# Altium PCB switch-SS12D11-G5_2024-05-03.pcbdoc
Units mm, origin at the board's own origin, x right, y up, seen from the top; angles counter-clockwise.
Board outline 42.21 x 43.19 mm, 2 copper layers (Top Layer, Bottom Layer); 1 components, 0 nets, 5 pads, 0 vias.
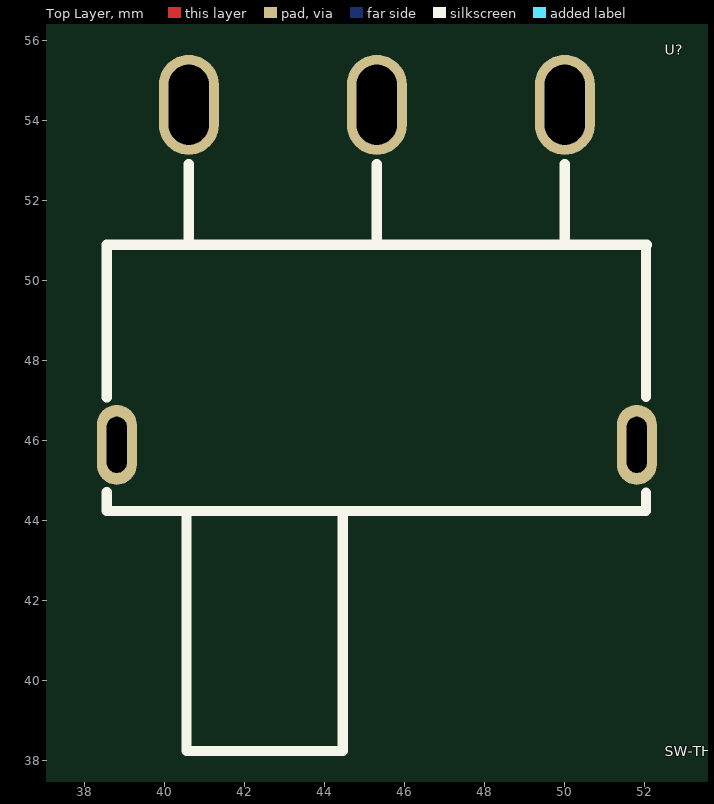
[diagram p0: Top Layer view]
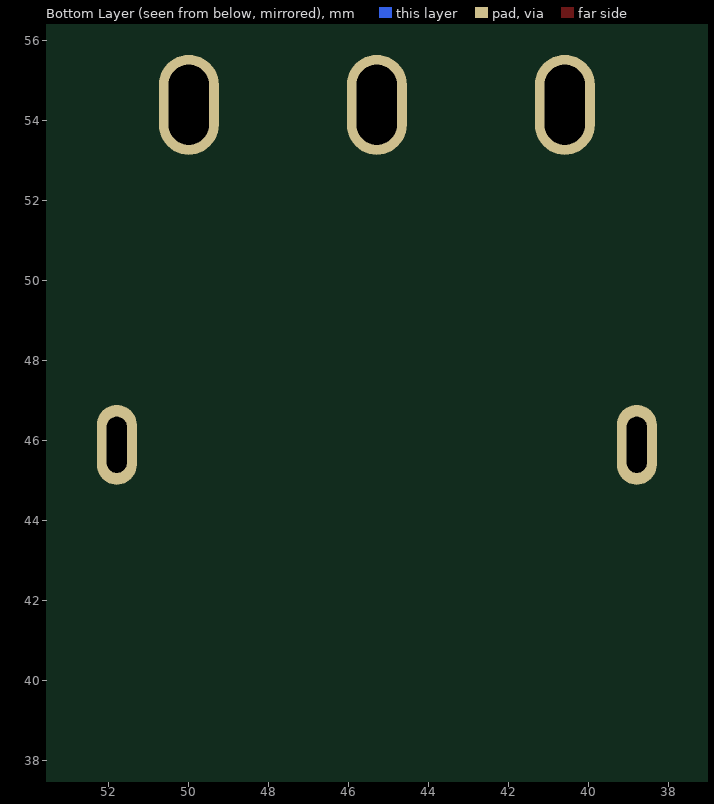
[diagram p1: Bottom Layer view, seen from below]

## Layer stack, top to bottom
Top Layer: signal copper (thickness not stored)
Dielectric: dielectric 0.32, FR-4, Dk 4.8
Bottom Layer: signal copper (thickness not stored)

## Board outline
67.613,25.4 25.4,25.4 25.4,68.591 67.613,68.591

## Components (designator, comment, footprint, x,y, rotation, side; value= is the part's Value field where it differs from the comment)
U? "SW-TH_KH-SS12D11-G5" SW-TH_KH-SS12D11-G5 45.3,46.869 r0 top

## Footprints (in the part's own frame and the unit in brackets; to place one, negate y for a bottom-side part, rotate by r counter-clockwise, add the part's x,y. Pads: shape width x height; smd on the part's side, far side on the other; paste and mask are expansions set on the pad)
SW-TH_KH-SS12D11-G5 [mm]
  oval 1.5x2.5 hole 1 slot 2 at 90 deg paste+0 mask+0.051: 1(-4.7,7.519) 2(0,7.519) 3(4.7,7.519)
  oval 1x2 hole 0.5 slot 1.4 at 90 deg paste+0 mask+0.051: 4(6.5,-0.981) 5(-6.5,-0.981)
  silkscreen extent -6.75,-8.64 6.75,6.04

## Nets (pads, with @x,y where several pads share a name; then routed paths per layer and width w, separated by ;. In a path a pad name is that pad's centre, name@x,y a point inside that pad or via, vN(x,y) a via of type N, cw(c..) or ccw(c..) an arc to the next point about the centre after c; other vN are vias at no path point)
pads on no net: U?.1 U?.2 U?.3 U?.4 U?.5